# EAGLE board hello echo_Arpi_02 (EAGLE 8.0.2)
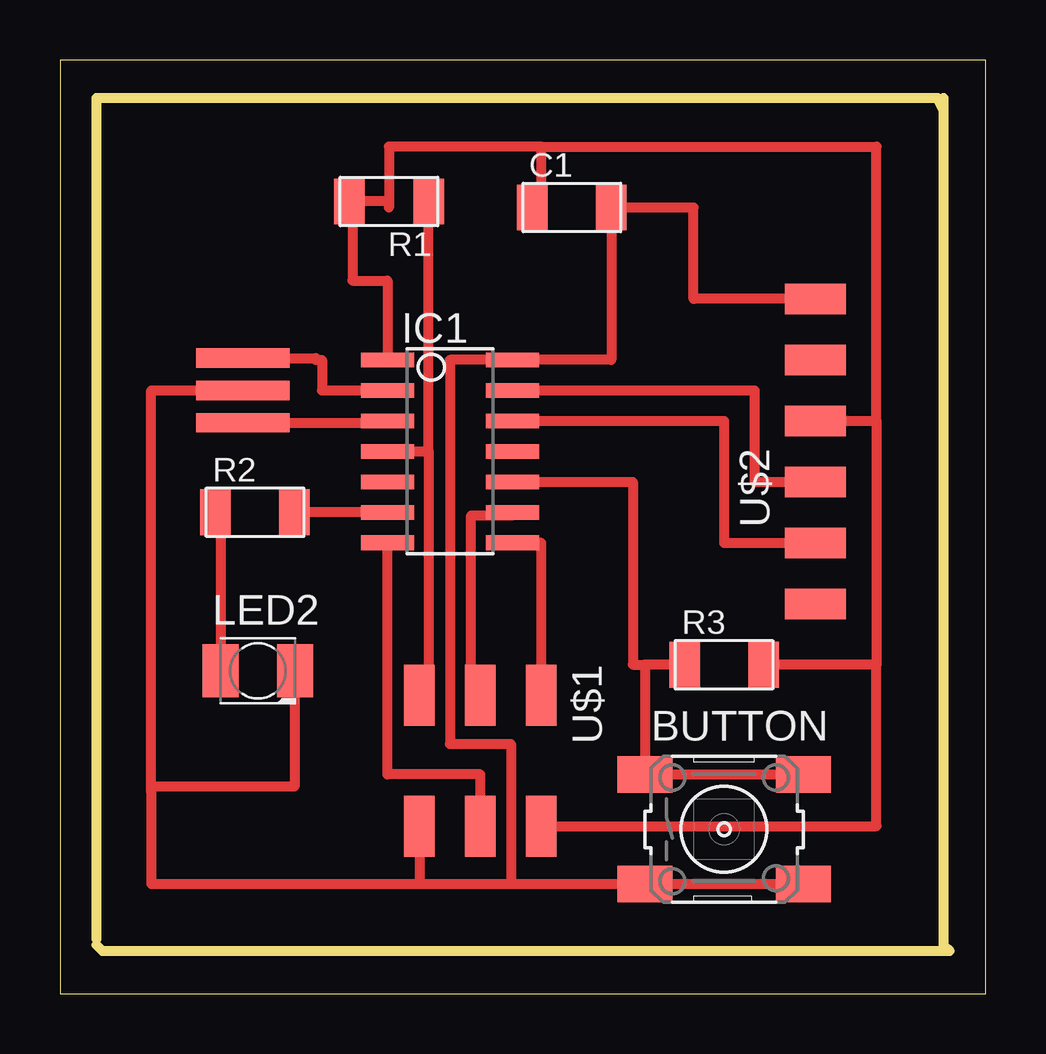
[diagram p0: board, top side]

Size 38.59 x 38.91 mm. Coordinates in mm from the lower left corner, seen from the top.
Outline: 36.83,37.34 36.83,36.83
Outline: 36.83,36.83 36.83,2.03 37.08,1.78 1.78,1.78 1.52,2.03
Outline: 1.52,2.29 1.52,37.34 36.58,37.34 36.83,36.83
Outline: 0,0 38.59,0 38.59,38.91 0,38.91 0,0
Copper layers (1*16): Top 0.035mm / dielectric 1.5mm / Bottom 0.035mm
Design rules "fab": minimum track width 0.3mm, minimum drill 32mil, track to track 0.315mm, track to pad 0.315mm, pad to pad 0.315mm, via to via 0.315mm, smd to smd 0.315mm, copper to edge 40mil, drill to drill 16mil, minimum pad ring 10mil, minimum via ring 8mil, stop-mask expansion 4mil, vias tented up to drill 0mil, thermal gap 10mil

## Footprints (pad centres in the part's own frame; a part is rotated, then mirrored left to right if it is on the bottom)
6MM_SWITCH = smd 2.286 x 1.524: 1 -3.302,2.286; 2 3.302,2.286; 3 -3.302,-2.286; 4 3.302,-2.286
C1206FAB = smd 1.27 x 1.905: 1 -1.651,0; 2 1.651,0
SOIC14 = smd 0.61 x 2.21: 1 -3.81,-2.603; 2 -2.54,-2.603; 3 -1.27,-2.603; 4 0,-2.603; 5 1.27,-2.603; 6 2.54,-2.603; 7 3.81,-2.603; 8 3.81,2.603; 9 2.54,2.603; 10 1.27,2.603; 11 0,2.603; 12 -1.27,2.603; 13 -2.54,2.603; 14 -3.81,2.603
KA-3528ASYC = smd 1.5 x 2.2: A -1.55,0; C 1.55,0
R1206FAB = smd 1.27 x 1.905: 1 -1.651,0; 2 1.651,0
2X03SMD = smd 2.54 x 1.27: 1 -2.54,2.54; 2 2.92,2.54; 3 -2.54,0; 4 2.92,0; 5 -2.54,-2.54; 6 2.92,-2.54
1X06SMD = smd 2.54 x 1.27: 1 0,6.35; 2 0,3.81; 3 0,1.27; 4 0,-1.27; 5 0,-3.81; 6 0,-6.35
EFOBM = smd 0.8 x 3.9: 1 -1.35,0; 2 0,0; 3 1.35,0

## Placement (x,y rotation side)
BUTTON  0  [6MM_SWITCH]  27.69,6.86 0 top
C1  CAP-US1206FAB  [C1206FAB]  21.34,32.77 0 top
IC1  ATTINY44-SSU  [SOIC14]  16.26,22.61 270 top
LED2  [KA-3528ASYC]  8.25,13.46 0 top
R1  10k  [R1206FAB]  13.72,33.02 180 top
R2  499  [R1206FAB]  8.13,20.07 0 top
R3  10K  [R1206FAB]  27.69,13.72 0 top
U$1  AVRISPSMD  [2X03SMD]  17.53,9.91 270 top
U$2  FTDI-SMD-HEADER  [1X06SMD]  31.5,22.61 0 top
U$3  RESONATOR  [EFOBM]  7.62,25.15 270 top

## Library data of the parts
BUTTON C1 IC1 R1-R3 U$1-U$3 = fab
LED2 = led

## Nets
BUTTON: BUTTON.1 BUTTON.2 IC1.10 R3.1
GND: BUTTON.3 BUTTON.4 C1.2 IC1.14 LED2.C U$1.6 U$2.1 U$3.2
LED: IC1.6 R2.2
MISO: IC1.8 U$1.1
MOSI: IC1.7 U$1.4
N$2: LED2.A R2.1
N$3: IC1.2 U$3.1
N$4: IC1.3 U$3.3
RST: IC1.4 R1.1 U$1.5
RTS: U$2.6
RX: IC1.12 U$2.5
SCK: IC1.9 U$1.3
TX: IC1.13 U$2.4
VCC: C1.1 IC1.1 R1.2 R3.2 U$1.2 U$2.3

## Tracks (layer width: path | path; a pad name or v marks a point on that pad's centre or on a via)
BUTTON
  Top 0.406: IC1.10 23.88,21.34 23.88,13.72 24.38,13.72 | R3.1 24.38,13.72 | BUTTON.2 BUTTON.1 24.38,13.72
GND
  Top 0.406: 18.8,4.57 14.99,4.57 | 18.8,4.57 BUTTON.3 BUTTON.4 | 14.99,4.57 3.81,4.57 3.81,8.38 | U$3.2 3.81,25.15 3.81,8.38 | U$2.1 26.42,28.96 26.42,32.77 C1.2 22.99,26.42 IC1.14 16.26,26.42 16.26,10.41 18.8,10.41 18.8,4.57 | U$1.6 14.99,4.57 | LED2.C 9.78,13.46 9.78,8.64 3.81,8.64 3.81,8.38
LED
  Top 0.406: IC1.6 R2.2
MISO
  Top 0.406: U$1.1 20.07,18.8 IC1.8
MOSI
  Top 0.406: U$1.4 17.53,9.14 13.65,9.14 IC1.7
N$2
  Top 0.406: R2.1 6.71,20.07 LED2.A
N$3
  Top 0.406: U$3.1 10.67,26.5 10.67,26.42 10.92,26.42 10.92,25.15 IC1.2
N$4
  Top 0.406: U$3.3 13.65,23.8 IC1.3
RST
  Top 0.406: U$1.5 15.37,12.45 15.37,22.61 | 15.37,22.61 R1.1 | IC1.4 15.37,22.61
RX
  Top 0.406: IC1.12 27.69,23.88 27.69,18.8 U$2.5
SCK
  Top 0.406: U$1.3 17.14,12.45 17.14,19.94 18.86,19.94 IC1.9
TX
  Top 0.406: IC1.13 28.96,25.15 28.96,21.34 U$2.4
VCC
  Top 0.406: 34.04,13.72 R3.2 | 34.04,23.88 34.04,13.72 | 34.04,23.88 34.04,35.31 20.07,35.31 | 20.07,35.31 13.72,35.31 13.72,33.02 | 13.72,33.02 13.72,32.77 | C1.1 20.07,32.77 20.07,35.31 | U$2.3 34.04,23.88 | U$1.2 34.04,6.99 34.04,13.72 | IC1.1 13.65,29.72 12.19,29.72 12.19,33.02 R1.2 13.72,33.02